# EAGLE board Embedded_II_MAIN_BOARD (EAGLE 9.3.0)
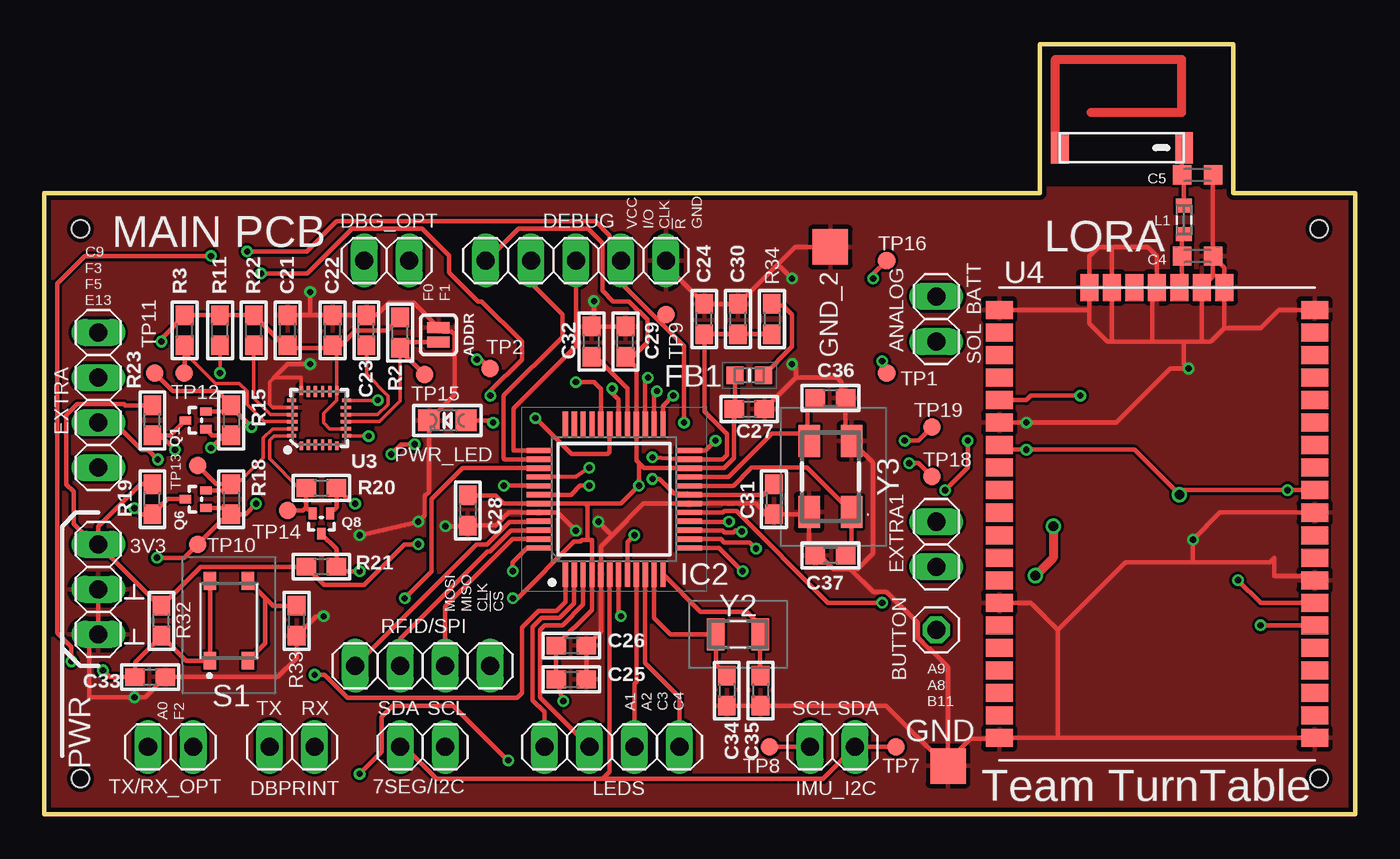
[diagram p0: board, top side]
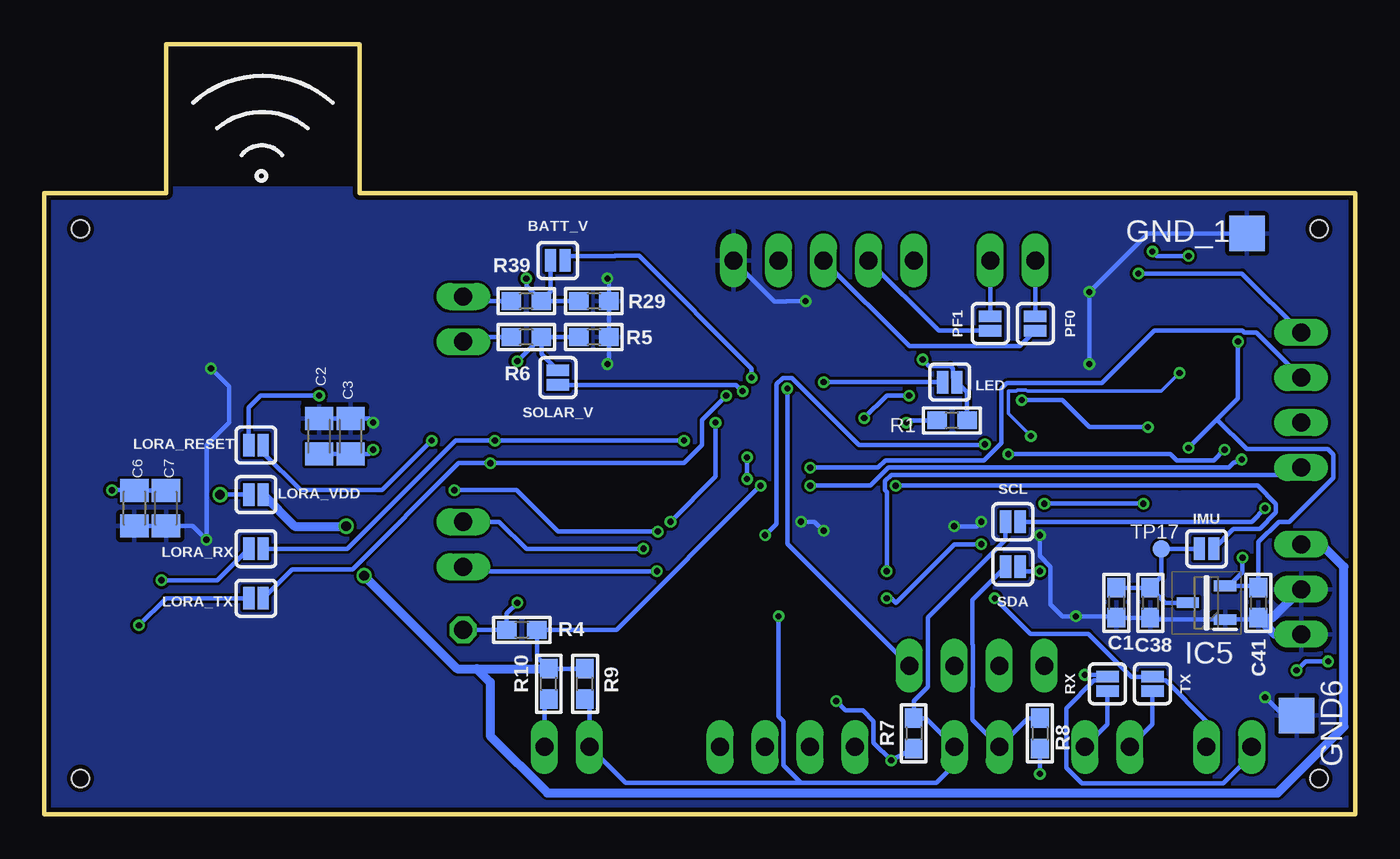
[diagram p1: board, bottom side, seen from below]

Size 73.91 x 43.43 mm. Coordinates in mm from the lower left corner, seen from the top.
Outline: 73.91,0 73.91,35.05 67.06,35.05 67.06,43.43 56.13,43.43 56.13,35.05 0,35.05 0,0 73.91,0
Copper layers (1*16): Top 0.035mm / dielectric 1.5mm / Bottom 0.035mm
Design rules "SeeedStudio_2layer_DRU_no_angle_20140221-2": minimum track width 6mil, minimum drill 12mil, track to track 6mil, track to pad 6mil, pad to pad 6mil, via to via 6mil, smd to smd 0mil, copper to edge 10mil, drill to drill 10mil, minimum pad ring 10mil, minimum via ring 6mil, stop-mask expansion 2mil, vias tented up to drill 100mil, thermal gap 10mil
Holes 1 mm at 71.88,33.02 2.03,33.02 2.03,2.03 71.88,2.03

## Footprints (pad centres in the part's own frame; a part is rotated, then mirrored left to right if it is on the bottom)
1X02 = drill 1.016 long: 1 -1.27,0; 2 1.27,0
SMT-JUMPER_2_NO_SILK = smd 0.635 x 1.27: 1 -0.406,0; 2 0.406,0
1X01 = drill 1.016 octagon: 1 0,0
0603 = smd 1.1 x 1: 1 -0.85,0; 2 0.85,0
C0805K = smd 1.3 x 1.6: 1 -1,0; 2 1,0
C0603K = smd 1.05 x 1.08: 1 -0.875,0; 2 0.875,0
1X05 = drill 1.016 long: 1 -5.08,0; 2 -2.54,0; 3 0,0; 4 2.54,0; 5 5.08,0
1X04 = drill 1.016 long: 1 -3.81,0; 2 -1.27,0; 3 1.27,0; 4 3.81,0
BEADC1608X100N = smd 0.95 x 1: 1 -0.8,0; 2 0.8,0
TP20SQ = smd 2 x 2: TP 0,0
QFP50P900X900X120-48N = smd 1.45 x 0.3: 1 -4.225,2.75; 2 -4.225,2.25; 3 -4.225,1.75; 4 -4.225,1.25; 5 -4.225,0.75; 6 -4.225,0.25; 7 -4.225,-0.25; 8 -4.225,-0.75; 9 -4.225,-1.25; 10 -4.225,-1.75; 11 -4.225,-2.25; 12 -4.225,-2.75; 25 4.225,-2.75; 26 4.225,-2.25; 27 4.225,-1.75; 28 4.225,-1.25; 29 4.225,-0.75; 30 4.225,-0.25; 31 4.225,0.25; 32 4.225,0.75; 33 4.225,1.25; 34 4.225,1.75; 35 4.225,2.25; 36 4.225,2.75 | smd 0.3 x 1.45: 13 -2.75,-4.225; 14 -2.25,-4.225; 15 -1.75,-4.225; 16 -1.25,-4.225; 17 -0.75,-4.225; 18 -0.25,-4.225; 19 0.25,-4.225; 20 0.75,-4.225; 21 1.25,-4.225; 22 1.75,-4.225; 23 2.25,-4.225; 24 2.75,-4.225; 37 2.75,4.225; 38 2.25,4.225; 39 1.75,4.225; 40 1.25,4.225; 41 0.75,4.225; 42 0.25,4.225; 43 -0.25,4.225; 44 -0.75,4.225; 45 -1.25,4.225; 46 -1.75,4.225; 47 -2.25,4.225; 48 -2.75,4.225
SOT95P237X112-3N = smd 1.25 x 0.6: 1 -1.05,0.95; 2 -1.05,-0.95; 3 1.05,0
WE-MK_0603 = smd 0.8 x 0.9: 1 -0.8,0; 2 0.8,0
1X03 = drill 1.016 long: 1 -2.54,0; 2 0,0; 3 2.54,0
CHIPLED_0805 = smd 1.2 x 1.2: A 0,-1.05; C 0,1.05
SOT-416FL = smd 0.46 x 0.65: 1 -0.5,-1.1; 2 0.5,-1.1; 3 0,0.05
PTS815SJK250SMTRLFS = smd 1 x 0.7: 1 -2.25,1.075; 2 2.25,1.075; 3 -2.25,-1.075; 4 2.25,-1.075
TP10R = smd 1 x 1: TP 0,0
SPARKFUN-SENSORS_QFN24-3X3 = smd 0.495 x 0.191: 1 -1.552,1; 6 -1.552,-1; 13 1.552,-1; 18 1.552,1 | smd 0.6 x 0.191: 2 -1.5,0.6; 3 -1.5,0.2; 4 -1.5,-0.2; 5 -1.5,-0.6; 14 1.5,-0.6; 15 1.5,-0.2; 16 1.5,0.2; 17 1.5,0.6 | smd 0.191 x 0.495: 7 -1,-1.552; 12 1,-1.552; 19 1,1.552; 24 -1,1.552 | smd 0.191 x 0.6: 8 -0.6,-1.5; 9 -0.2,-1.5; 10 0.2,-1.5; 11 0.6,-1.5; 20 0.6,1.5; 21 0.2,1.5; 22 -0.2,1.5; 23 -0.6,1.5
RN2483 = smd 1.524 x 1.016: GND 17.78,1.27; GND1 17.78,10.16; GND2 17.78,13.97; GND3 17.78,25.4; GND9 0,25.4; GND10 0,19.05; GND11 0,8.89; GND12 0,1.27; GPIO0 0,16.51; GPIO1 0,15.24; GPIO2 0,13.97; GPIO3 0,12.7; GPIO4 0,11.43; GPIO5 0,10.16; GPIO6 0,6.35; GPIO7 0,5.08; GPIO8 0,3.81; GPIO9 0,2.54; GPIO10 17.78,17.78; GPIO11 17.78,16.51; GPIO12 17.78,12.7; GPIO13 17.78,11.43; P$1 0,21.59; P$2 0,22.86; P$3 0,24.13; P$4 17.78,24.13; P$5 17.78,22.86; P$6 17.78,21.59; P$7 17.78,20.32; P$8 17.78,19.05; P$9 17.78,6.35; P$10 17.78,5.08; P$11 0,7.62; RESET° 0,20.32; UART_CTS 17.78,3.81; UART_RTS 17.78,2.54; UART_RX 17.78,8.89; UART_TX 17.78,7.62; VDD 17.78,15.24; VDD2 0,17.78 | smd 1.016 x 1.524: GND4 12.7,26.67; GND5 11.43,26.67; GND6 8.89,26.67; GND7 6.35,26.67; GND8 5.08,26.67; RFH 10.16,26.67; RFL 7.62,26.67
CERAMIC-ANTENNA = smd 1 x 1.8: P$1 0,0; P$2 7,0
FC135327680KAAG0 = smd 1 x 1.8: 1 -1.25,0; 2 1.25,0
ABM3B8000MHZ101UT = smd 1.8 x 1.2: 1 -2,-1.2; 2 2,-1.2; 3 2,1.2; 4 -2,1.2

## Placement (x,y rotation side)
7SEG/I2C  7SEG/I2C  [1X02]  21.34,3.81 180 top
ADDR  ADR  [SMT-JUMPER_2_NO_SILK]  22.23,27.05 270 top
ANALOG  ANALOG  [1X02]  50.29,27.94 90 top
BATT_V  BATT_V  [SMT-JUMPER_2_NO_SILK]  44.96,31.24 0 bottom
BUTTON  BUTTON  [1X01]  50.29,10.41 180 top
C1  10u  [0603]  13.46,11.94 270 bottom
C2  10u  [C0805K]  58.42,21.34 90 bottom
C3  100n  [C0805K]  56.64,21.34 90 bottom
C4  [C0603K]  65.02,31.5 180 top
C5  [C0603K]  65.02,36.07 180 top
C6  10u  [C0805K]  68.83,17.27 270 bottom
C7  100n  [C0805K]  67.06,17.27 270 bottom
C21  1u  [0603]  13.72,27.3 90 top
C22  100n  [0603]  16.26,27.3 90 top
C23  100n  [0603]  18.16,27.3 90 top
C24  10u  [0603]  37.21,27.94 90 top
C25  10u  [0603]  29.72,7.62 0 top
C26  100n  [0603]  29.72,9.53 0 top
C27  100n  [0603]  39.75,22.86 0 top
C28  100n  [0603]  23.88,17.14 270 top
C29  100n  [0603]  32.77,26.67 90 top
C30  10n  [0603]  39.12,27.94 90 top
C31  10n  [0603]  41.15,17.78 270 top
C32  1u  [0603]  30.86,26.67 90 top
C33  100n  [0603]  5.97,7.75 0 top
C34  18p  [0603]  38.48,6.98 270 top
C35  18p  [0603]  40.39,6.98 270 top
C36  12p  [0603]  44.32,23.5 0 top
C37  12p  [0603]  44.32,14.61 180 top
C38  1u  [0603]  11.56,11.94 270 bottom
C41  1u  [0603]  5.46,11.94 270 bottom
DBG_OPT  DBG_OPT  [1X02]  19.3,31.24 0 top
DBPRINT  DBPRINT  [1X02]  13.97,3.81 0 top
DEBUG  debug_header  [1X05]  29.97,31.24 0 top
EXTRA  EXTRA  [1X04]  3.05,23.37 270 top
EXTRA1  EXTRA  [1X02]  50.29,15.24 90 top
FB1  74279266  [BEADC1608X100N]  39.75,24.77 0 top
GND  TPTP20SQ  [TP20SQ]  50.95,2.73 0 top
GND6  TPTP20SQ  [TP20SQ]  3.3,5.59 0 bottom
GND_1  TPTP20SQ  [TP20SQ]  6.1,32.77 0 bottom
GND_2  TPTP20SQ  [TP20SQ]  44.32,32 0 top
IC2  EFM32HG322F64G-C-QFP48R  [QFP50P900X900X120-48N]  32.13,17.78 90 top
IC5  TPS7A0518PDBZR  [SOT95P237X112-3N]  8.38,11.94 180 bottom
IMU  IMU  [SMT-JUMPER_2_NO_SILK]  8.38,14.99 0 bottom
IMU_I2C  IMU_I2C  [1X02]  44.45,3.81 0 top
L1  WE-MK_0603_744786118  [WE-MK_0603]  64.26,33.53 90 top
LED  LED  [SMT-JUMPER_2_NO_SILK]  22.86,24.38 180 bottom
LEDS  LEDS  [1X04]  32,3.81 0 top
LORA_RESET  LORA_RESET  [SMT-JUMPER_2_NO_SILK]  61.98,20.83 180 bottom
LORA_RX  LORA_RX  [SMT-JUMPER_2_NO_SILK]  61.98,14.99 180 bottom
LORA_TX  LORA_TX  [SMT-JUMPER_2_NO_SILK]  61.98,12.19 180 bottom
LORA_VDD  LORA_VDD  [SMT-JUMPER_2_NO_SILK]  61.98,18.03 180 bottom
PF0  PF0  [SMT-JUMPER_2_NO_SILK]  18.03,27.69 270 bottom
PF1  PF1  [SMT-JUMPER_2_NO_SILK]  20.57,27.69 270 bottom
PWR  PWR  [1X03]  3.05,12.7 270 top
PWR_LED  Green/Blue  [CHIPLED_0805]  22.73,22.23 90 top
Q1  20V/0.2A/8MHz/1.2Ω/1Vth  [SOT-416FL]  8,22.23 90 top
Q6  20V/0.2A/8MHz/1.2Ω/1Vth  [SOT-416FL]  8,17.78 90 top
Q8  20V/0.2A/8MHz/1.2Ω/1Vth  [SOT-416FL]  15.62,15.88 180 top
R1  120  [0603]  22.73,22.23 180 bottom
R2  2.2k  [0603]  20.07,27.18 90 top
R3  NC  [0603]  7.92,27.31 90 top
R4  10k  [0603]  46.99,10.41 0 bottom
R5  220k  [0603]  42.93,26.92 180 bottom
R6  1Meg  [0603]  46.74,26.92 180 bottom
R7  10k  [0603]  24.89,4.57 270 bottom
R8  10k  [0603]  17.78,4.57 270 bottom
R9  10k  [0603]  43.43,7.37 90 bottom
R10  10k  [0603]  45.47,7.37 90 bottom
R11  NC  [0603]  9.91,27.3 90 top
R15  2.2k  [0603]  10.54,22.23 270 top
R18  2.2k  [0603]  10.54,17.78 270 top
R19  2.2k  [0603]  6.1,17.78 90 top
R20  2.2k  [0603]  15.62,18.41 0 top
R21  2.2k  [0603]  15.62,13.97 180 top
R22  NC  [0603]  11.81,27.3 90 top
R23  2.2k  [0603]  6.1,22.23 90 top
R29  12Meg  [0603]  42.93,28.96 180 bottom
R32  NC  [0603]  6.6,10.92 90 top
R33  100  [0603]  14.22,10.92 90 top
R34  1  [0603]  41.02,27.94 270 top
R39  10Meg  [0603]  46.74,28.96 180 bottom
RFID/SPI  RFID / SPI  [1X04]  21.34,8.38 0 top
RX  RX  [SMT-JUMPER_2_NO_SILK]  13.97,7.37 270 bottom
S1  PTS815_SJK_250_SMTR_LFS  [PTS815SJK250SMTRLFS]  10.41,10.92 90 top
SCL  SCL  [SMT-JUMPER_2_NO_SILK]  19.3,16.51 180 bottom
SDA  SDA  [SMT-JUMPER_2_NO_SILK]  19.3,13.97 180 bottom
SOLAR_V  SOLAR_V  [SMT-JUMPER_2_NO_SILK]  44.96,24.64 270 bottom
TP1  TPTP10R  [TP10R]  47.5,24.89 0 top
TP2  TPTP10R  [TP10R]  25.15,25.15 0 top
TP7  TPTP10R  [TP10R]  48.01,3.81 0 top
TP8  TPTP10R  [TP10R]  40.89,3.81 0 top
TP9  TPTP10R  [TP10R]  35.05,28.19 0 top
TP10  TPTP10R  [TP10R]  8.64,15.24 0 top
TP11  TPTP10R  [TP10R]  6.22,24.89 0 top
TP12  TPTP10R  [TP10R]  7.87,24.89 0 top
TP13  TPTP10R  [TP10R]  8.64,19.69 0 top
TP14  TPTP10R  [TP10R]  13.72,17.14 0 top
TP15  TPTP10R  [TP10R]  21.43,24.8 0 top
TP16  TPTP10R  [TP10R]  47.5,31.24 0 top
TP17  TPTP10R  [TP10R]  10.92,14.99 0 bottom
TP18  TPTP10R  [TP10R]  50.04,19.05 0 top
TP19  TPTP10R  [TP10R]  50.04,21.84 0 top
TX  TX  [SMT-JUMPER_2_NO_SILK]  11.43,7.37 90 bottom
TX/RX_OPT  TX/RX_OPT  [1X02]  7.11,3.81 180 top
U3  9DoF IMU  [SPARKFUN-SENSORS_QFN24-3X3]  15.49,22.35 90 top
U4  RN2483  [RN2483]  53.85,3.05 0 top
U$2  ANTENNA868  [CERAMIC-ANTENNA]  64.26,37.59 180 top
Y2  FC-135_32.7680KA-A3  [FC135327680KAAG0]  39.12,10.16 0 top
Y3  ABM3B-24.000MHZ-B2-T  [ABM3B8000MHZ101UT]  44.32,19.05 90 top

## Library data of the parts
7SEG/I2C ANALOG BUTTON DBG_OPT DBPRINT DEBUG EXTRA EXTRA1 IMU_I2C LEDS PWR RFID/SPI TX/RX_OPT = pinhead
ADDR BATT_V IMU LED LORA_RESET LORA_RX LORA_TX LORA_VDD PF0 PF1 RX SCL SDA SOLAR_V TX = SparkFun-Jumpers
C1 C21-C38 C41 PWR_LED R1-R11 R15 R18-R23 R29 R32-R34 R39 = microbuilder
C2-C7 = rcl; SPICEPREFIX: C
FB1 = SamacSys_Parts; DESCRIPTION: WE-CBF Ferrite Bead 0603 1000Ohm 200mA Wurth WE-CBF Series +/-25% Ferrite Multilayer SMD Inductor, 0603 Case, 200mA dc 600m Rdc; HEIGHT: 1mm; MANUFACTURER_NAME: Wurth Elektronik; MANUFACTURER_PART_NUMBER: 74279266; MOUSER_PART_NUMBER: 710-74279266; MOUSER_PRICE-STOCK: https://www.mouser.com/Search/Refine.aspx?Keyword=710-74279266
GND GND6 GND_1 GND_2 TP1 TP2 TP7-TP19 = testpad
IC2 = SamacSys_Parts; DESCRIPTION: ARM Microcontrollers - MCU ARM Cortex -M0+ Happy Gecko Microcontroller IC 32-Bit 25MHz 64KB Flash QFN48 (7x7); HEIGHT: 1.2mm; MANUFACTURER_NAME: Silicon Labs; MANUFACTURER_PART_NUMBER: EFM32HG322F64G-C-QFP48R; MOUSER_PART_NUMBER: 634-HG322F64GCQFP48R; MOUSER_PRICE-STOCK: https://www.mouser.com/Search/Refine.aspx?Keyword=634-HG322F64GCQFP48R
IC5 = SamacSys_Parts; DESCRIPTION: 1-A, ultra-low-IQ, 200-mA low-dropout (LDO) regulator in a small-sized package; HEIGHT: 1.12mm; MANUFACTURER_NAME: Texas Instruments; MANUFACTURER_PART_NUMBER: TPS7A0518PDBZR; MOUSER_PART_NUMBER: 595-TPS7A0518PDBZR; MOUSER_PRICE-STOCK: https://www.mouser.com/Search/Refine.aspx?Keyword=595-TPS7A0518PDBZR
L1 U4 U$2 = project
Q1 Q6 Q8 = SparkFun-DiscreteSemi; PROD_ID: TRANS_14399
S1 = SamacSys_Parts; DESCRIPTION: Tactile Switches Tact Switch, 12 VDC, 50 mA, 4.2x3.2, 2.5mm H, 250gf, J leads; HEIGHT: 2mm; MANUFACTURER_NAME: C & K COMPONENTS; MANUFACTURER_PART_NUMBER: PTS815 SJK 250 SMTR LFS; MOUSER_PART_NUMBER: 611-PTS815SJK250SMTR; MOUSER_PRICE-STOCK: https://www.mouser.com/Search/Refine.aspx?Keyword=611-PTS815SJK250SMTR
U3 = Wireless_IMU_v1.0; PROD_ID: IC-14247
Y2 = SamacSys_Parts; DESCRIPTION: Crystals 32.768KHz 20ppm 12.5pF -40C -85C; HEIGHT: 0mm; MANUFACTURER_NAME: Epson Timing; MANUFACTURER_PART_NUMBER: FC-135 32.7680KA-A3; MOUSER_PART_NUMBER: 732-FC135-32.76KAA3; MOUSER_PRICE-STOCK: https://www.mouser.com/Search/Refine.aspx?Keyword=732-FC135-32.76KAA3
Y3 = SamacSys_Parts; DESCRIPTION: Abracon 24MHz Crystal +/-20ppm SMD 5 x 3 x 1.1mm; HEIGHT: 1.1mm; MANUFACTURER_NAME: ABRACON; MANUFACTURER_PART_NUMBER: ABM3B-24.000MHZ-B2-T; MOUSER_PART_NUMBER: 815-ABM3B-24-B2; MOUSER_PRICE-STOCK: https://www.mouser.com/Search/Refine.aspx?Keyword=815-ABM3B-24-B2

## Nets
1.8V: C21.1 C22.1 C41.1 IC5.2 Q1.1 Q6.1 Q8.1 R2.2 R3.2 R11.2 R15.2 R18.2 R20.2 R22.2 TP10.TP U3.8 U3.13
!CS: R3.1 TP12.TP U3.22
!CS!_RFID: IC2.30 RFID/SPI.4
AD0/SDO: ADDR.2 R2.1 TP15.TP U3.9
AUX_CL: R11.1 U3.7
AUX_DA: R22.1 U3.21
AVDD: C24.1 C30.1 C31.1 IC2.19 IC2.23 R34.2
BATT_VOLTAGE: BATT_V.1 R29.2 R39.1 TP16.TP
DBG_!RESET: C33.1 DEBUG.4 IC2.16 R32.1 S1.1 S1.2 TP9.TP
DBG_SWCLK: DEBUG.3 IC2.37 PF0.2
DBG_SWDIO: DEBUG.2 IC2.38 PF1.2
DBPRINT_RX: DBPRINT.2 RX.2
DBPRINT_TX: DBPRINT.1 TX.1
DECOUPLE: C32.1 IC2.29
GND: ADDR.1 C1.2 C2.2 C3.2 C4.1 C5.1 C6.2 C7.2 C21.2 C22.2 C23.2 C24.2 C25.2 C26.2 C27.2 C28.2 C29.2 C30.2 C31.2 C32.2 C33.2 C34.2 C35.2 C36.2 C37.2 C38.2 C41.2 DEBUG.5 GND6.TP GND.TP GND_1.TP GND_2.TP IC2.5 IC2.18 IC2.44 IC5.1 PWR.2 PWR.3 PWR_LED.C R5.1 R29.1 R33.1 U3.18 U3.20 U4.GND U4.GND1 U4.GND2 U4.GND3 U4.GND4 U4.GND5 U4.GND6 U4.GND7 U4.GND8 U4.GND9 U4.GND10 U4.GND11 U4.GND12 Y3.2 Y3.4
IMU_VDD: C1.1 C38.1 IC5.3 IMU.1 TP17.TP
IMU_VDD_PIN: IC2.41 IMU.2
INT: Q1.2 R15.1 TP11.TP U3.12
INT_VIN: IC2.8 Q1.3 R23.1
LED: LED.1 R1.1 TP2.TP
LORA_!RESET!: IC2.15 LORA_RESET.1
LORA_RX: IC2.24 LORA_RX.1 TP19.TP
LORA_TX: IC2.25 LORA_TX.1 TP18.TP
N$1: C5.2 L1.2 U$2.P$1
N$2: C4.2 L1.1 U4.RFH
N$3: PWR_LED.A R1.2
N$5: IC2.32 LED.2
N$6: LORA_RX.2 U4.UART_RX
N$7: LORA_TX.2 U4.UART_TX
N$8: LORA_RESET.2 U4.RESET°
N$9: C35.1 IC2.12 Y2.2
N$10: C23.1 U3.10
N$14: C34.1 IC2.11 Y2.1
N$19: C37.1 IC2.20 Y3.1
N$20: C36.1 IC2.21 Y3.3
N$22: R33.2 S1.3 S1.4
N$24: FB1.2 R34.1
PA0: IC2.1 RX.1 TX/RX_OPT.2
PA1: IC2.2 LEDS.1
PA2: IC2.3 LEDS.2
PA8: EXTRA1.1 IC2.13
PA9: EXTRA1.2 IC2.14
PB11: BUTTON.1 IC2.17 R4.1
PC3: IC2.9 LEDS.3
PC4: IC2.10 LEDS.4
PC9: EXTRA.1 IC2.31
PD6: IC2.26 SOLAR_V.2
PD7: BATT_V.2 IC2.27
PE10: IC2.45 RFID/SPI.1
PE11: IC2.46 RFID/SPI.2
PE12: IC2.47 RFID/SPI.3
PE13: EXTRA.4 IC2.48
PF0: DBG_OPT.1 PF0.1
PF1: DBG_OPT.2 PF1.1
PF2: IC2.39 TX.2 TX/RX_OPT.1
PF3: EXTRA.2 IC2.40
PF5: EXTRA.3 IC2.42
SCL: 7SEG/I2C.1 IC2.7 IMU_I2C.1 R7.1 R9.1 SCL.2 TP8.TP
SCL/SCLK: Q6.2 R18.1 TP13.TP U3.23
SCL/SCLK_VIN: Q6.3 R19.1 SCL.1
SDA: 7SEG/I2C.2 IC2.6 IMU_I2C.2 R8.1 R10.1 SDA.2 TP7.TP
SDA/SDI: Q8.2 R20.1 TP14.TP U3.24
SDA/SDI_VIN: Q8.3 R21.1 SDA.1
SOLAR_VOLTAGE: R5.2 R6.1 SOLAR_V.1 TP1.TP
V_BATT: ANALOG.2 R39.2
V_SOLAR: ANALOG.1 R6.2
VDD: C25.1 C26.1 C27.1 C28.1 C29.1 DEBUG.1 FB1.1 IC2.4 IC2.22 IC2.28 IC2.43 LORA_VDD.1 PWR.1 R4.2 R7.2 R8.2 R9.2 R10.2 R19.2 R21.2 R23.2 R32.2
VDD_LORA: C2.1 C3.1 C6.1 C7.1 LORA_VDD.2 U4.VDD U4.VDD2

## Tracks (layer width: path | path; a pad name or v marks a point on that pad's centre or on a via)
1.8V  (via drill 0.35)
  Top 0.203: U3.8 16.09,21.75 15.75,22.1 15.75,22.61 16.49,23.35 U3.13 16.49,26.22 16.4,26.31 16.27,26.44 C22.1
  Top 0.254: Q6.1 10.19,17.28 R18.2 | Q1.1 9.45,21.38 R15.2 10.1,21.38 v9.4,20.67 | Q8.1 16.47,17.32 R20.2 17.36,17.53 v17.53,17.53 | 16.4,26.31 13.86,26.31 C21.1 13.51,26.45 R22.2 R11.2 R3.2 6.6,26.84 v6.6,26.67 | R2.2 19.32,27.28 17.55,27.28 16.7,26.44 16.27,26.44 | v11.94,17.53 11.34,16.93 R18.2 | R18.2 10.33,16.93 TP10.TP 7.87,14.48 v6.35,14.48
  Bottom 0.254: 7.11,12.89 5.56,12.89 C41.1 5.46,15.37 4.32,16.51 3.71,16.51 1.25,18.97 1.25,20.3 1.55,20.6 6.12,20.6 7.8,22.27 | 7.11,12.89 IC5.2 | v17.53,17.53 v11.94,17.53 | v6.6,26.67 6.6,23.47 7.8,22.27 | 7.8,22.27 v9.4,20.67 | v6.35,14.48 6.35,13.65 7.11,12.89
!CS
  Top 0.203: U3.22 12.39,22.15 11.43,23.11 11.43,23.88 11,24.31 9.66,24.31 7.92,26.06 R3.1
  Top 0.254: R3.1 7.92,24.94 TP12.TP
!CS!_RFID  (via drill 0.35)
  Top 0.254: v32.02,24.02 32.02,23.77 32.38,23.4 IC2.30
  Bottom 0.254: RFID/SPI.4 32.02,15.26 v32.02,24.02
AD0/SDO
  Top 0.203: R2.1 20.07,23.31 18.91,22.15 U3.9
  Top 0.254: ADDR.2 20.38,26.64 R2.1 20.07,26.17 TP15.TP
AUX_CL  (via drill 0.35)
  Top 0.203: U3.7 18.27,21.35 v18.29,21.34 | v9.91,24.89 R11.1
  Bottom 0.203: v18.29,21.34 19.56,22.61 19.56,23.88 19.11,23.88 19.04,23.95 18.55,23.95 18.48,23.88 10.92,23.88 v9.91,24.89
AUX_DA
  Top 0.203: U3.21 12.75,22.55 11.81,23.5 R22.1
AVDD  (via drill 0.35)
  Top 0.254: C31.1 40.55,18.03 IC2.19 36.28,18.1 35.52,18.1 34.69,18.92 v34.29,18.92 | R34.2 C30.1 C24.1 37.21,22.73 38.49,21.45 38.49,20.27 38.25,20.03 IC2.23 v34.29,20.14
  Bottom 0.254: v34.29,18.92 v34.29,20.14
BATT_VOLTAGE  (via drill 0.35)
  Top 0.254: TP16.TP 46.74,30.48 v46.74,30.23
  Bottom 0.254: R29.2 R39.1 | R39.1 45.36,29.48 BATT_V.1 | v46.74,30.23 46.74,29.81 R39.1
DBG_!RESET  (via drill 0.35)
  Top 0.254: S1.2 S1.1 8,8.67 R32.1 5.12,8.59 C33.1 3.68,7.75 v3.3,8.13 | v36.07,22.1 36.07,26.42 34.67,27.81 | v38.61,16.51 36.38,16.51 IC2.16 | 34.67,27.81 32.51,29.97 DEBUG.4 31.88,31.88 31.88,32.66 31.08,33.45 16.48,33.45 14.78,31.75 v11.43,31.75 | TP9.TP 34.67,27.81 | v1.52,8.64 1.52,9.45 0.74,10.24 0.74,29.95 2.29,31.5 v9.4,31.5
  Bottom 0.254: v36.07,22.1 36.07,19.05 v38.61,16.51 | v3.3,8.13 2.79,8.64 v1.52,8.64 | v9.4,31.5 11.18,31.5 v11.43,31.75
DBG_SWCLK
  Top 0.254: IC2.37 26.46,20.53 26.46,22.9 29.97,26.42 DEBUG.3
  Bottom 0.254: PF0.2 18.9,26.42 25.15,26.42 DEBUG.3
DBG_SWDIO
  Top 0.254: IC2.38 25.94,20.03 25.91,20.07 25.91,23.62 29.21,26.92 29.21,28.19 27.43,29.97 DEBUG.2
  Bottom 0.254: PF1.2 23.47,27.28 DEBUG.2
DBPRINT_RX
  Bottom 0.254: RX.2 13.97,5.08 DBPRINT.2
DBPRINT_TX
  Bottom 0.254: TX.1 11.43,5.08 DBPRINT.1
DECOUPLE
  Top 0.254: IC2.29 32.88,24.02 31.08,25.82 C32.1
GND  (via drill 0.35)
  Top 0.203: U3.20 12.86,22.95 12.7,23.11 12.7,24.38 12.95,24.64 14.48,24.64 14.49,24.62 U3.18
  Top 0.254: C34.2 C35.2 47.46,6.13 50.86,2.73 GND.TP | C29.2 C32.2 30.99,27.65 v30.99,28.96 | C25.2 C26.2 31.38,10.34 IC2.5 31.38,15.12 32,15.75 | C21.2 14.99,28.16 | 14.99,28.16 C22.2 C23.2 18.75,28.16 19.45,28.86 20.82,28.86 ADDR.1 22.44,27.24 22.98,27.24 23.14,27.08 23.14,23.68 PWR_LED.C 21.68,18.19 21.44,17.95 21.44,16.87 v21.08,16.51 v17.78,15.75 | PWR.2 PWR.3 2.54,9.65 2.54,6.6 v5.08,6.6 5.68,6.6 C33.2 13.17,7.75 14.22,8.8 R33.1 15.33,11.18 v15.75,11.18 | 45.47,13.83 44.51,13.83 43.73,14.61 C37.2 43.12,14.96 Y3.4 43,16.93 C31.2 40.73,16.93 40.13,17.53 IC2.18 33.79,17.53 32,15.75 | 45.47,13.83 45.84,13.83 46.74,14.72 46.74,19.84 Y3.2 45.17,21.4 C36.2 44.96,23.71 44.96,24.38 44.7,24.64 42.38,24.64 | GND_2.TP 42.33,32 41.23,30.91 | 41.23,30.91 C30.2 C24.2 35.05,30.95 DEBUG.5 | v22.61,16.26 23.84,16.26 C28.2 25.44,16.3 26.17,17.03 IC2.44 28.94,17.03 v29.97,16 | 41.23,30.91 41.48,30.91 v42.16,30.23 | C27.2 42.38,24.64 | 42.38,24.64 42.38,25.19 v42.16,25.4 | GND.TP 50.95,8.34 49.92,9.37 49.86,9.37 49.25,9.98 49.25,10.79 47.5,12.54 46.75,12.54 45.47,13.83 | v31.24,16.51 32,15.75 | 12.95,24.64 13.72,25.4 v14.99,25.4 | v14.99,29.46 14.99,28.16 | GND.TP 50.95,2.98 52.22,4.25 53.78,4.25 U4.GND12 57.15,4.32 | 64.77,14.22 v64.77,15.49 66.29,17.02 U4.GND2 | U4.GND1 71.37,13.46 69.34,13.46 69.34,14.48 69.09,14.22 64.77,14.22 | C5.1 C4.1 | C4.1 66.55,30.85 U4.GND4 66.55,27.43 | C4.1 65.9,30.34 U4.GND5 65.28,26.67 | 60.2,32 62.23,32 62.74,31.5 U4.GND6 62.48,29.46 62.48,26.67 | 60.2,32 59.44,32 58.93,31.5 U4.GND8 58.93,28.45 | 60.2,32 U4.GND7 60.2,26.67 | 58.93,28.45 58.93,27.69 59.94,26.67 60.2,26.67
  Top 0.254: 60.2,26.67 62.48,26.67 | 62.48,26.67 64.26,26.67 | 64.26,26.67 65.28,26.67 | 65.28,26.67 65.79,26.67 66.55,27.43 | 66.55,27.43 68.58,27.43 69.6,28.45 U4.GND3 | 64.26,26.67 64.26,25.4 v64.52,25.15 63.5,25.15 60.45,22.1 v55.37,22.1 U4.GND10 | 57.15,4.32 U4.GND | U4.GND11 55.63,11.94 57.15,10.41 | 57.15,10.41 57.15,4.32 | 57.15,10.41 60.96,14.22 64.77,14.22 | U4.GND9 58.93,28.45
  Bottom 0.254: C41.2 5.56,10.99 IC5.1 11.46,10.99 C38.2 C1.2 13.55,11.18 v15.75,11.18 16.51,11.18 17.17,11.84 17.17,13.97 17.78,14.57 v17.78,15.75 | v21.08,16.51 21.34,16.26 v22.61,16.26 | v30.99,28.96 32.05,28.96 32.08,28.93 32.74,28.93 DEBUG.5 | v42.16,30.23 42.08,30.14 R29.1 R5.1 42.08,25.49 v42.16,25.4 | v29.97,16 30.48,16.51 v31.24,16.51 | v14.99,25.4 v14.99,29.46 11.68,32.77 GND_1.TP | v64.52,25.15 63.5,24.13 63.5,22.1 64.77,20.83 v64.77,15.49 65.55,16.27 C7.2 C6.2 | C2.2 C3.2 55.61,22.34 v55.37,22.1 | GND6.TP 4.06,5.59 v5.08,6.6
  Bottom 0.508: PWR.3 4.53,10.16 C41.2 4.66,11.09 PWR.2
  pour Top: -2.03,36.32 55.63,36.32 55.63,36.07 56.39,35.31 66.8,35.31 67.56,36.07 75.18,36.07 75.69,35.56 75.69,-0.51 74.68,-1.52 -0.25,-1.52 -2.03,0.25
  pour Bottom: -2.54,36.83 54.86,36.83 56.39,35.31 66.8,35.31 67.56,36.07 75.69,36.07 75.69,-1.02 74.93,-1.78 -0.76,-1.78 -2.54,0
IMU_VDD
  Bottom 0.254: IC5.3 10.71,11.94 C38.1 | C38.1 C1.1 | TP17.TP 10.92,14.73 | 10.92,14.73 10.92,13.42 C38.1 | IMU.1 10.67,14.99 10.92,14.73
IMU_VDD_PIN  (via drill 0.35)
  Top 0.254: v25.91,18.54 27.89,18.54 IC2.41
  Bottom 0.254: IMU.2 6.86,16.1 5.39,16.1 4.47,17.02 4.47,17.52 5.49,18.54 9.91,18.54 v25.91,18.54
INT  (via drill 0.35)
  Top 0.203: U3.12 18.78,23.35 v18.8,23.37
  Top 0.254: Q1.2 10.19,22.73 R15.1 | v11.68,21.84 10.54,22.99 R15.1 | TP11.TP 7.24,23.88 9.74,23.88 R15.1
  Bottom 0.254: v11.68,21.84 14.99,21.84 16.51,23.37 v18.8,23.37
INT_VIN  (via drill 0.35)
  Top 0.254: Q1.3 7.1,21.38 R23.1 6.57,21.38 v7.37,20.57 | IC2.8 32.88,15.36 v33.27,15.75 | v20.88,20.88 20.11,20.88 v19.56,20.32
  Bottom 0.254: v33.27,15.75 32.63,16.4 32.63,24.27 32.27,24.63 31.77,24.63 27.97,20.83 20.92,20.83 v20.88,20.88 | v19.56,20.32 10.41,20.32 10.06,19.96 7.98,19.96 v7.37,20.57
LED  (via drill 0.35)
  Top 0.254: TP2.TP 24.64,25.65 v24.38,25.65
  Bottom 0.254: R1.1 21.88,23.81 LED.1 22.67,24.6 22.67,25.13 22.83,25.3 24.03,25.3 v24.38,25.65
LORA_!RESET!  (via drill 0.35)
  Top 0.254: v39.32,15.95 39.25,16.03 38.99,16.03 38.86,15.9 38.36,15.9 38.23,16.03 IC2.15 | v50.8,18.29 52.07,19.56 v52.07,21.08
  Bottom 0.254: v39.32,15.95 44.96,15.95 47.29,18.29 v50.8,18.29 | LORA_RESET.1 61.57,20.39 59.47,18.29 55.12,18.29 54.86,18.29 v52.07,21.08
LORA_RX  (via drill 0.35)
  Top 0.254: IC2.24 37.29,20.53 v37.85,21.08 | TP19.TP 49.28,21.08 v48.51,21.08
  Bottom 0.254: LORA_RX.1 56.83,14.99 50.73,21.08 v48.51,21.08 v37.85,21.08
LORA_TX  (via drill 0.35)
  Top 0.254: v35.46,23.62 34.88,23.04 IC2.25 | TP18.TP 49.28,19.81 v48.77,19.81
  Bottom 0.254: LORA_TX.1 59.94,13.82 56.54,13.82 50.55,19.81 v48.77,19.81 37.85,19.81 36.83,20.83 36.83,22.25 v35.46,23.62
N$1
  Top 0.254: L1.2 64.26,35.95 C5.2 64.15,37.48 U$2.P$1
N$2
  Top 0.254: U4.RFH 64.15,29.86 C4.2 64.15,32.62 L1.1
N$3  (via drill 0.35)
  Top 0.254: v25.3,22.1 25.17,22.23 PWR_LED.A
  Bottom 0.254: R1.2 25.17,22.23 v25.3,22.1
N$5  (via drill 0.35)
  Top 0.254: IC2.32 31.38,23.99 30.99,24.38 v29.97,24.38
  Bottom 0.254: LED.2 v29.97,24.38
N$6  (via drill 0.35)
  Top 0.254: U4.UART_RX 68.58,11.94 v67.31,13.21
  Bottom 0.254: LORA_RX.2 64.16,13.21 v67.31,13.21
N$7  (via drill 0.35)
  Top 0.254: v68.58,10.67 U4.UART_TX
  Bottom 0.254: LORA_TX.2 67.06,12.19 v68.58,10.67
N$8  (via drill 0.35)
  Top 0.254: U4.RESET° 55.37,23.37 55.63,23.62 v58.42,23.62
  Bottom 0.254: LORA_RESET.2 62.38,22.96 61.72,23.62 v58.42,23.62
N$9
  Top 0.254: IC2.12 37.01,11.43 39.62,11.43 40.37,10.69 Y2.2 40.37,7.86 C35.1
N$10
  Top 0.203: C23.1 18.16,24.83 19.38,23.61 19.38,23.13 18.8,22.55 U3.10
N$14
  Top 0.254: IC2.11 34.38,11.09 35.31,10.16 Y2.1 37.87,8.45 C34.1
N$19
  Top 0.254: C37.1 45.52,14.96 Y3.1 43.02,19.56 39.88,19.56 38.85,18.53 IC2.20
N$20
  Top 0.254: 43.04,21.49 41.04,21.49 38.58,19.03 IC2.21 | C36.1 43.04,23.06 43.04,21.49 | Y3.3 43.12,21.41 43.04,21.49
N$22
  Top 0.254: S1.4 12.46,12.2 | 12.46,12.2 12.89,11.77 R33.2 | S1.3 12.46,9.64 12.46,12.2
N$24
  Top 0.254: R34.1 41.11,28.7 41.66,28.7 42.16,28.19 42.16,26.38 FB1.2
PA0  (via drill 0.35)
  Top 0.254: v15.24,7.87 15.8,7.87 17.09,6.58 26.64,6.58 26.92,6.86 26.92,10.55 27.86,11.48 28.87,11.48 29.38,11.99 IC2.1
  Bottom 0.254: v15.24,7.87 14.07,7.87 RX.1 14.19,7.56 14.72,7.56 16.28,6 16.28,2.62 15.42,1.75 7.44,1.75 5.84,3.35 TX/RX_OPT.2
PA1
  Top 0.254: LEDS.1 28.19,5.78 27.53,6.44 27.53,10.58 28.03,11.07 29.04,11.07 29.88,11.91 IC2.2
PA2
  Top 0.254: IC2.3 30.38,11.84 29.21,10.67 28.19,10.67 27.94,10.41 27.94,6.6 LEDS.2
PA8  (via drill 0.35)
  Top 0.254: IC2.13 38.06,15.03 v39.37,13.72
  Bottom 0.254: v39.37,13.72 50.04,13.72 EXTRA1.1
PA9  (via drill 0.35)
  Top 0.254: IC2.14 38.16,15.53 38.34,15.35 39.77,15.35 v40.13,14.99
  Bottom 0.254: v40.13,14.99 46.74,14.99 48.26,16.51 EXTRA1.2
PB11  (via drill 0.35)
  Top 0.254: IC2.17 38.27,17.03 38.36,17.12 39.02,17.12 44.2,11.94 v47.24,11.94
  Bottom 0.254: BUTTON.1 R4.1 47.84,11.34 v47.24,11.94
PC3
  Top 0.254: LEDS.3 33.27,7.37 33.38,7.47 IC2.9
PC4
  Top 0.254: LEDS.4 35.81,6.6 33.88,8.54 IC2.10
PC9  (via drill 0.35)
  Top 0.254: IC2.31 31.88,20.45 31.75,20.32 29.72,20.32 v27.69,22.35 | v25.15,23.62 25.15,23.88 26.92,25.65 26.92,26.67 24.66,28.93 24.46,28.93 22.84,30.56 22.84,31.52 21.31,33.05 17.35,33.05 14.81,30.51 v12.22,30.51
  Bottom 0.254: v27.69,22.35 26.42,23.62 v25.15,23.62 | v12.22,30.51 6.38,30.51 EXTRA.1
PD6  (via drill 0.35)
  Top 0.254: IC2.26 34.38,23.71 v34.54,23.88
  Bottom 0.254: v34.54,23.88 34.9,24.23 SOLAR_V.2
PD7  (via drill 0.35)
  Top 0.254: v34.04,24.64 33.88,24.48 IC2.27
  Bottom 0.254: BATT_V.2 44.3,31.5 41.74,31.5 41.73,31.51 40.39,31.51 34.04,25.16 v34.04,24.64
PE10
  Top 0.254: IC2.45 27.89,16.51 26.23,16.51 24.96,15.24 24.38,15.24 RFID/SPI.1
PE11
  Top 0.254: RFID/SPI.2 20.07,9.91 24.99,14.83 25.13,14.83 26.32,16.03 IC2.46
PE12
  Top 0.254: IC2.47 26.4,15.53 22.61,11.74 RFID/SPI.3
PE13  (via drill 0.35)
  Top 0.254: IC2.48 27.22,15.03 26.42,14.22 v26.42,13.72
  Bottom 0.254: v26.42,13.72 26.42,18.19 26.52,18.29 26.52,18.79 26.16,19.15 3.36,19.15 3.05,19.46 EXTRA.4
PF0
  Bottom 0.254: DBG_OPT.1 PF0.1
PF1
  Bottom 0.254: DBG_OPT.2 PF1.1
PF2  (via drill 0.35)
  Top 0.254: v20.32,12.19 21.84,13.72 21.84,17.78 23.59,19.53 IC2.39
  Bottom 0.254: v20.32,12.19 18.31,10.19 15.04,10.19 12.62,7.77 TX.2 11.21,7.56 10.68,7.56 8.38,5.26 TX/RX_OPT.1
PF3  (via drill 0.35)
  Top 0.254: IC2.40 29.97,19.05 v30.73,19.56
  Bottom 0.254: v30.73,19.56 26.9,19.56 26.5,19.96 20.93,19.96 19.94,20.95 19.94,24.03 19.64,24.33 14.28,24.33 11.33,27.28 6.35,27.28 6.25,27.18 5.59,27.18 EXTRA.2
PF5  (via drill 0.35)
  Top 0.254: v30.73,18.54 30.2,18.54 29.69,18.03 IC2.42 | v6.4,20.02 5.87,20.55 5.48,20.55 4.38,21.65 3.5,21.65 EXTRA.3
  Bottom 0.254: v30.73,18.54 27.34,18.54 26.33,19.55 7.11,19.55 6.86,19.81 v6.4,20.02
SCL  (via drill 0.35)
  Top 0.254: IC2.7 32.38,11.31 v32.51,11.18 | IMU_I2C.1 TP8.TP
  Bottom 0.254: v32.51,11.18 32.51,5.54 32.23,5.26 32.23,2.77 31.24,1.78 | 31.24,1.78 23.62,1.78 22.61,2.79 7SEG/I2C.1 24.22,5.42 R7.1 24.89,6.4 24.11,7.19 24.11,11.1 19.71,15.49 SCL.2 | R9.1 43.18,6.26 IMU_I2C.1 41.15,1.78 31.24,1.78
SCL/SCLK
  Top 0.203: R18.1 10.87,18.63 12.34,20.1 12.34,21.23 12.87,21.75 U3.23
  Top 0.254: Q6.2 10.19,18.28 R18.1 9.69,18.63 TP13.TP
SCL/SCLK_VIN  (via drill 0.35)
  Top 0.254: Q6.3 6.95,17.78 R19.1 5.42,16.93 v5.08,17.27
  Bottom 0.254: SCL.1 5.84,16.51 v5.08,17.27
SDA
  Top 0.254: IC2.6 31.88,2.42 31.47,2.01 | 31.47,2.01 22.12,2.01 20.07,4.06 7SEG/I2C.2 | 31.47,2.01 43.92,2.01 IMU_I2C.2 TP7.TP
  Bottom 0.254: R10.1 45.72,6.26 IMU_I2C.2 | R8.1 18.45,5.42 7SEG/I2C.2 21.59,5.33 21.59,7.16 21.56,7.19 21.56,9.57 21.59,9.6 21.59,12.09 SDA.2
SDA/SDI
  Top 0.203: U3.24 13.93,21.34 12.95,21.34 12.7,21.08 12.7,20.07 14.35,18.41 R20.1
  Top 0.254: R20.1 14.77,17.32 | 14.77,17.32 Q8.2 | TP14.TP 14.59,17.14 14.77,17.32
SDA/SDI_VIN  (via drill 0.35)
  Top 0.254: Q8.3 16.47,14.97 R21.1 16.73,13.72 v17.78,13.72
  Bottom 0.254: SDA.1 18.64,13.72 v17.78,13.72
SOLAR_VOLTAGE  (via drill 0.35)
  Top 0.254: v47.24,25.57 47.24,25.15 TP1.TP
  Bottom 0.254: R5.2 R6.1 | SOLAR_V.1 45.89,25.97 R6.1 | R6.1 v47.24,25.57
V_BATT
  Bottom 0.254: R39.2 50.04,28.96 ANALOG.2
V_SOLAR
  Bottom 0.254: R6.2 50.04,26.92 ANALOG.1
VDD  (via drill 0.35, 0.55)
  Top 0.254: C29.1 32.98,25.61 | 32.98,25.61 33.38,25.2 IC2.28 33.38,19.96 33.53,19.81 | C28.1 25.44,18 25.91,17.53 IC2.43 30.48,17.53 | FB1.1 38.95,22.91 C27.1 38.9,20.11 38.33,19.53 IC2.22 33.81,19.53 33.53,19.81 | PWR.1 3.05,16.26 5.42,18.63 R19.2 | PWR.1 6.52,11.77 R32.2 8.8,13.97 R21.2 15.79,12.95 18.03,12.95 20.32,15.24 v21.08,15.24 | DEBUG.1 24.94,31.24 26.75,33.05 30.66,33.05 31.47,32.23 31.47,29.54 32.08,28.93 32.98,28.93 34,27.91 34,26.64 32.98,25.61 | 30.63,15.49 30.63,17.38 30.48,17.53 | 33.53,19.81 v33.53,18.54 32.51,17.53 30.48,17.53 | v26.42,12.19 26.67,12.19 29.87,15.39 30.22,15.39 30.32,15.49 30.63,15.49 | 30.63,15.49 30.88,15.49 IC2.4 30.88,11.54 C26.1 C25.1 v29.26,6.4 | PWR.1 2.79,15.24 1.65,16.38 1.65,18.21 1.25,18.62 1.25,22.53 1.86,23.14 4.5,23.14 4.56,23.07 R23.2 | v17.78,2.29 19.02,3.53 19.02,5.51 19.63,6.12 23.04,6.12 26.11,3.05 v26.16,3.05
  Top 0.508: v56.9,16.26 56.9,14.48 v55.88,13.46
  Bottom 0.254: R9.2 R10.2 46.14,8.89 R4.2 41.66,10.41 v33.53,18.54 | v21.08,15.24 22.61,15.24 25.91,11.94 26.16,12.19 v26.42,12.19 | R8.2 v17.78,2.29 | R7.2 v26.16,3.05 27.15,4.04 27.15,5.26 27.76,5.87 28.73,5.87 v29.26,6.4
  Bottom 0.508: LORA_VDD.1 59.79,16.26 v56.9,16.26 | v55.88,13.46 50.63,8.22 49.53,8.22 | 49.53,8.22 R10.2 | 49.53,8.22 48.77,7.45 48.77,4.44 45.54,1.22 4.37,1.22 0.63,4.95 0.63,13.97 1.91,15.24 PWR.1
VDD_LORA  (via drill 0.35, 0.55)
  Top 0.254: U4.VDD v70.1,18.29 64.26,18.29 v64.01,18.03 61.47,20.57 v55.37,20.57 54.1,20.57 U4.VDD2
  Bottom 0.254: LORA_VDD.2 v64.01,18.03 | C7.1 C6.1 68.85,18.29 v70.1,18.29 | C2.1 C3.1 55.61,20.34 v55.37,20.57

## Text on the board
tNames: VCC / I/O / CLK / !R! / GND | MAIN PCB | LORA | F0 / F1 | C9 / F3 / F5 / E13 | BATT | SOL | 3V3 | MOSI / MISO / CLK / !CS! | A1 / A2 / C3 / C4 | A9 / A8 / B11 | A0 / F2 | TX | RX | SDA | SCL | SCL | SDA | Team TurnTable